# Altium PCB LazeMWC 0_2.PcbDoc
Units mm, origin at the board's own origin, x right, y up, seen from the top; angles counter-clockwise.
Board outline 32 x 22 mm, 2 copper layers (Top Layer, Bottom Layer); 26 components, 31 nets, 102 pads, 20 vias.
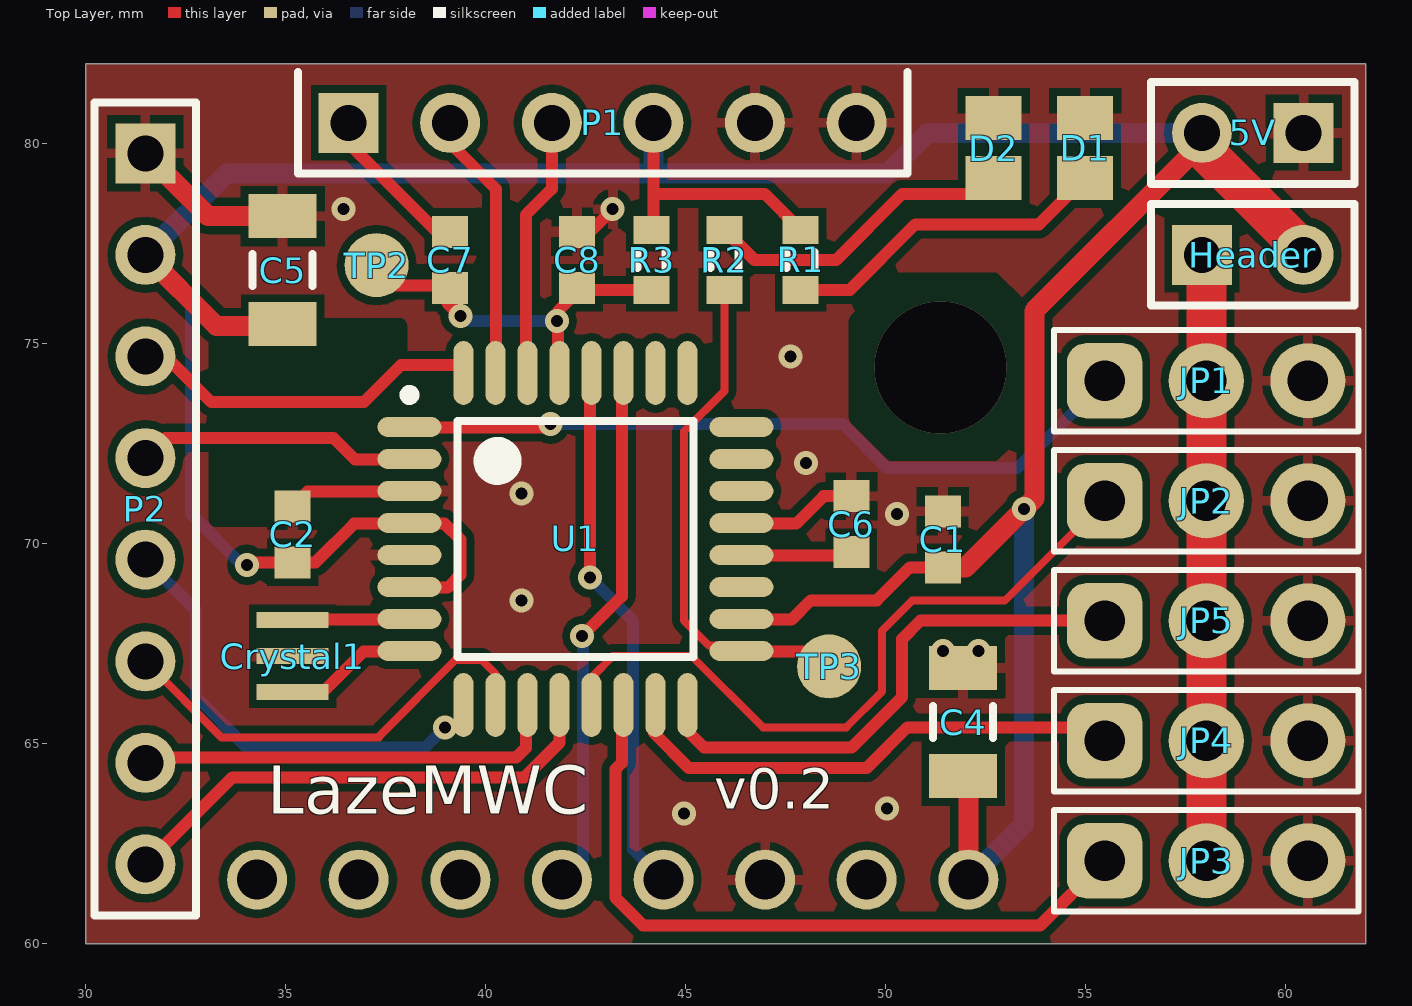
[diagram p0: Top Layer view]
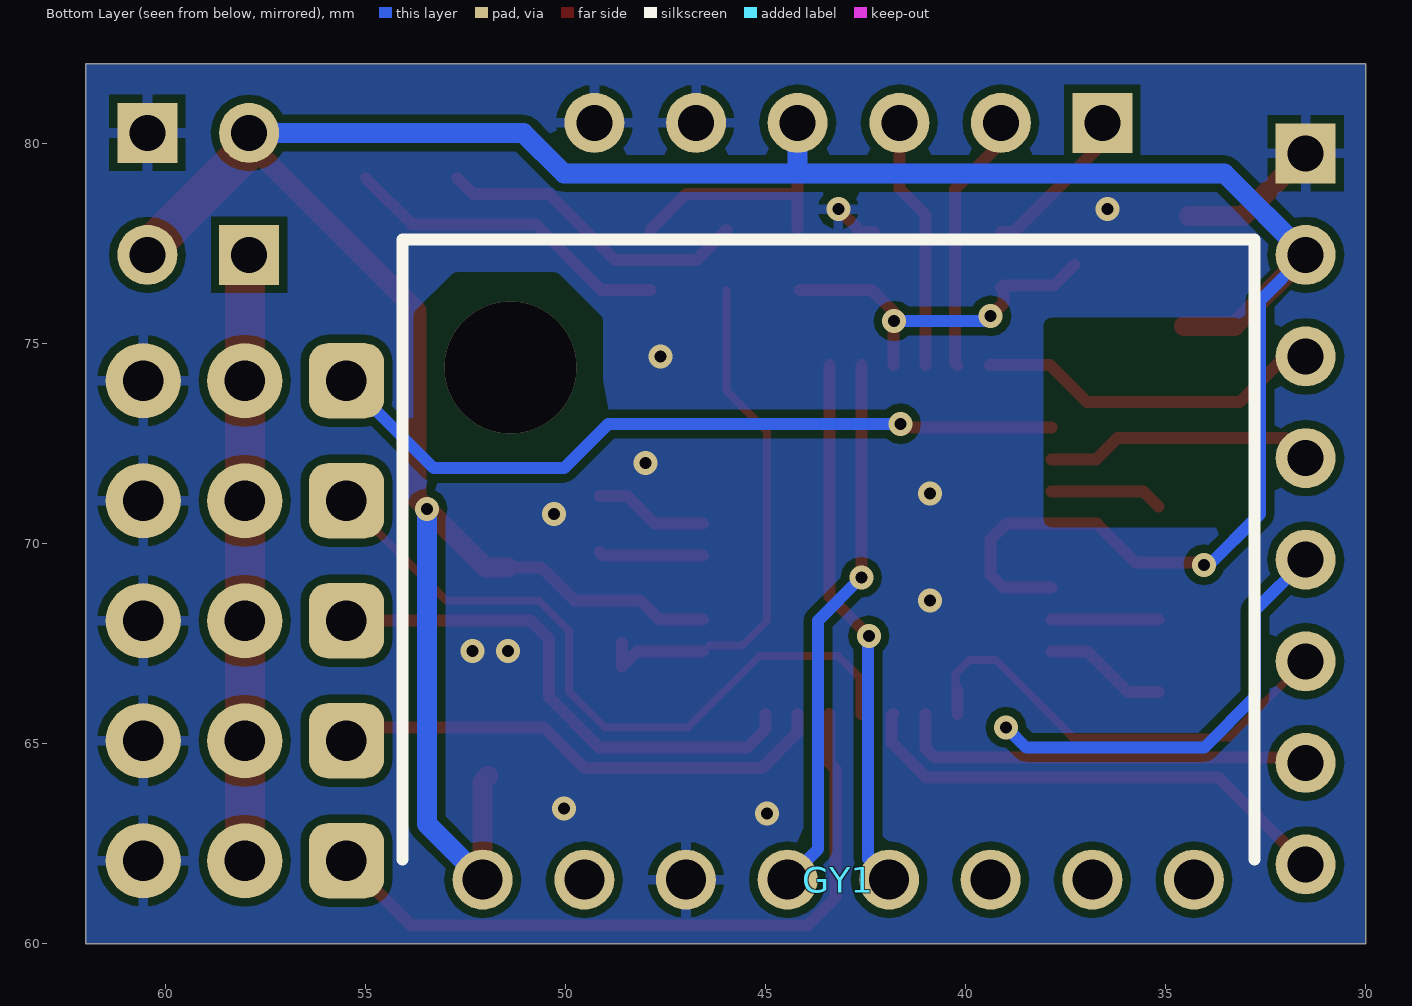
[diagram p1: Bottom Layer view, seen from below]

## Layer stack, top to bottom
Top Layer: signal copper 0.0356
Dielectric: dielectric 0.32, FR-4, Dk 4.8
Bottom Layer: signal copper 0.0356

## Board outline
30,60 30,82 62,82 62,60

## Design rules (kind name [scope] priority, off if disabled: settings)
Clearance [All] p1: gap=0.2
HoleSize [All] p1: absolutevalues=TRUE maxlimit=4 minlimit=0.3 maxpercent=80.000 minpercent=20.000
HoleToHoleClearance [All] p1: gap=0.2 allowstackedmicrovias=TRUE
MinimumSolderMaskSliver [All] p1: minsoldermaskwidth=0
PolygonConnect [All] p1: connectstyle=Relief reliefconductorwidth=0.254 reliefentries=4 polygonreliefangle="90 Angle"
RoomDefinition LazeMWC [InComponentClass('LazeMWC')] p1: confinementstyle=ConfineOut formatcopy=TRUE lockcomponents=FALSE outline 57.023,10.541 192.913,10.541 192.913,35.052 57.023,35.052
RoutingVias [All] p1: holewidth=0.3 width=0.6 viastyle="Through Hole" minholewidth=0.3 minwidth=0.6 maxholewidth=4 maxwidth=4
SilkToSilkClearance [All] p1: silktosilkclearance=0.2
SilkscreenOverComponentPads [All] p1: minsilkscreentomaskgap=0
SolderMaskExpansion [All] p1: expansion=0.102
Width [All] p1: maxlimit=3 minlimit=0.2 preferedwidth=0.3
23 further rules are at their usual default settings.

## Components (designator, comment, footprint, x,y, rotation, side; value= is the part's Value field where it differs from the comment)
5V "Header 2" HDR1X2 60.452,80.264 r180 top
C1 "104" CAPC1608L 51.435,70.104 r270 top
C2 "104" CAPC1608L 35.179,70.231 r270 top
C4 "20uF" CAPC3216L 51.943,65.532 r270 top
C5 "20uF" CAPC3216L 34.925,76.835 r270 top
C6 "104" CAPC1608L 49.149,70.485 r90 top
C7 "104" CAPC1608L 39.116,77.089 r90 top
C8 "RST" CAPC1608L 42.291,77.089 r270 top
Crystal1 "16MHz" Crystal3Foot 35.179,67.183 r180 top
D1 "Pwr" CAPC2012L 54.991,79.883 r90 top
D2 "LED" CAPC2012L 52.705,79.883 r90 top
GY1 "GY-87" GY-87 52.07,61.595 r90 bottom locked
Header "Header 2" HDR1X2 57.912,77.216 r0 top
JP1 "Servo out 1" JP 58,74 r0 top
JP2 "Servo out 1" JP 58,71 r0 top
JP3 "Servo out 1" JP 58,62 r0 top
JP4 "Servo out 1" JP 58,65 r0 top
JP5 "Servo out 1" JP 58,68 r0 top
P1 "FTDI" HDR1X6 36.576,80.518 r0 top locked
P2 "PWM IN" HDR1X8 31.496,79.756 r270 top
R1 "1k" RESC1608L 47.879,77.089 r90 top
R2 "1k" RESC1608L 45.974,77.089 r270 top
R3 "10k" RESC1608L 44.154,77.089 r90 top
TP2 "Test Pad" "Test Pad"#1 37.211,76.835 r90 top
TP3 "Test Pad" "Test Pad"#2 48.768,66.929 r90 top
U1 "ATMEGA8_TQFP32" atmega328fix 42.249,70.114 r0 top locked

## Footprints (in the part's own frame and the unit in brackets; to place one, negate y for a bottom-side part, rotate by r counter-clockwise, add the part's x,y. Pads: shape width x height; smd on the part's side, far side on the other; paste and mask are expansions set on the pad)
atmega328fix [mm] "QFP, 32-Leads, Body 9.0x9.0mm (max), Pitch 0.80mm, IPC Medium Density"
  oval 1.6x0.5 smd: 1(-4.15,2.8) 2(-4.15,2) 3(-4.15,1.2) 4(-4.15,0.4) 5(-4.15,-0.4) 6(-4.15,-1.2) 7(-4.15,-2) 8(-4.15,-2.8) 17(4.15,-2.8) 18(4.15,-2) 19(4.15,-1.2) 20(4.15,-0.4) 21(4.15,0.4) 22(4.15,1.2) 23(4.15,2) 24(4.15,2.8)
  oval 0.5x1.6 smd: 9(-2.8,-4.15) 10(-2,-4.15) 11(-1.2,-4.15) 12(-0.4,-4.15) 13(0.4,-4.15) 14(1.2,-4.15) 15(2,-4.15) 16(2.8,-4.15) 25(2.8,4.15) 26(2,4.15) 27(1.2,4.15) 28(0.4,4.15) 29(-0.4,4.15) 30(-1.2,4.15) 31(-2,4.15) 32(-2.8,4.15)
  silkscreen extent -4.27,-2.95 2.95,3.72, body extent -3.5,-3.5 3.5,3.5, height 2
CAPC1608L [mm] "Chip Capacitor, Body 1.6x0.8mm, IPC High Density"
  rect 0.8x0.9 smd: 1(-0.7,0) 2(0.7,0)
  body extent -0.87,-0.48 0.87,0.48, height 1.3
CAPC2012L [mm] "Chip Capacitor, Body 2.0x1.3mm, IPC High Density"
  rect 1.1x1.4 smd: 1(-0.75,0) 2(0.75,0)
  body extent -1.1,-0.72 1.1,0.72, height 1.4
CAPC3216L [mm] "Chip Capacitor, Body 3.2x1.6mm, IPC High Density"
  rect 1.1x1.7 smd: 1(-1.35,0) 2(1.35,0)
  silkscreen extent -0.4,-0.75 0.4,0.75, body extent -1.7,-0.9 1.7,0.9, height 1.3
Crystal3Foot [mm]
  rect 1.8x0.4 smd: 1(0,0.9) 2(0,0) 3(0,-0.9)
GY-87 [mm]
  round 1.5 hole 1: 1(0,0) 2(0,-2.54) 3(0,-5.08) 4(0,-7.62) 5(0,-10.16) 6(0,-12.7) 7(0,-15.24) 8(0,-17.78)
  Top Layer pour cut-out: 14.097,1.524 14.986,0.635 14.986,-1.778 13.97,-2.794 11.557,-2.794 10.668,-1.905 10.668,0.635 11.557,1.524
  Bottom Layer pour cut-out: 11.557,1.524 14.097,1.524 14.986,0.635 14.986,-1.778 13.97,-2.794 11.557,-2.794 10.668,-1.905 10.668,0.635
  silkscreen extent 0.5,-19.3 16,2
HDR1X2 [mm] "Connector; Header; 2 Position"
  rect 1.5x1.5 hole 0.9: 1(0,0)
  round 1.5 hole 0.9: 2(2.54,0)
  silkscreen extent -1.27,-1.27 3.81,1.27
HDR1X6 [mm] "Connector; Header; 6 Position"
  rect 1.5x1.5 hole 0.9: 1(0,0)
  round 1.5 hole 0.9: 2(2.54,0) 3(5.08,0) 4(7.62,0) 5(10.16,0) 6(12.7,0)
  silkscreen extent -1.27,-1.27 13.97,1.27
HDR1X8 [mm] "Connector; Header; 8 Position"
  rect 1.5x1.5 hole 0.9: 1(0,0)
  round 1.5 hole 0.9: 2(2.54,0) 3(5.08,0) 4(7.62,0) 5(10.16,0) 6(12.7,0) 7(15.24,0) 8(17.78,0)
  silkscreen extent -1.27,-1.27 19.05,1.27
JP [mil]
  rrect50% 74x74 hole 40: 1(-99.27,2.73)
  round 74 hole 40: 2(0.73,2.73) 3(100.73,2.73)
  silkscreen extent -149,-47 151,53, body extent -147,-45 149,50, height 394
RESC1608L [mm] "Chip Resistor, Body 1.6x0.8mm, IPC High Density"
  rect 0.7x0.9 smd: 1(-0.75,0) 2(0.75,0)
  silkscreen extent -0.2,-0.35 0.2,0.35, body extent -0.85,-0.48 0.85,0.48, height 0.9
"Test Pad"#1 [mm]
  round 1.6 smd: 1(0.127,-0.067)
"Test Pad"#2 [mm]
  round 1.6 smd: 1(0,0.18)

## Part data
5V Header: "Header, 2-Pin"
C1 C2 C4 C5 C6 C7 C8: library part "Cap Semi", "Capacitor (Semiconductor SIM Model)"
Crystal1: library part Crystal3Foot
D1 D2: library part LED2, "Typical RED, GREEN, YELLOW, AMBER GaAs LED"
JP1 JP2 JP3 JP4 JP5: library part "Hdr 3 Pin 0.1", "Header, 3-Pin, 0.1\""
P1: library part "Header 6", "Header, 6-Pin"
P2: library part "Header 8", "Header, 8-Pin"
R1 R2 R3: library part Res3, "Resistor"
U1: "Atmel Microcontroller - Library created by carel..  <www.mpfreezone.com>"

## Via types
v1: diameter 0.6, hole 0.3, Top Layer to Bottom Layer, tented both sides, 19 vias
v2: diameter 3.3, hole 3.3, Top Layer to Bottom Layer, 1 vias

## Nets (pads, with @x,y where several pads share a name; then routed paths per layer and width w, separated by ;. In a path a pad name is that pad's centre, name@x,y a point inside that pad or via, vN(x,y) a via of type N, cw(c..) or ccw(c..) an arc to the next point about the centre after c; other vN are vias at no path point)
A0: U1.23
A1: U1.24
A2: U1.25
A3: U1.26
A4: GY1.5 U1.27 | length 13.5
  Top Layer w0.3: v1(42.418,67.691) 43.406,68.679 U1.27@43.406,74.458
  Bottom Layer w0.3: GY1.5 42.433,62.118 42.433,67.676 v1(42.418,67.691)
A5: GY1.4 U1.28 | length 13.6
  Top Layer w0.3: v1(42.606,69.154) U1.28@42.606,74.458
  Bottom Layer w0.3: v1(42.606,69.154) 43.688,68.072 43.688,62.357 GY1.4
D2: P2.3 U1.32 | length 8.8
  Top Layer w0.3: P2.3 32.004,74.676 33.147,73.533 36.957,73.533 37.882,74.458 U1.32@39.406,74.458
D3: JP1.1 U1.1 | length 19
  Top Layer w0.3: U1.1@37.846,72.898 41.529,72.898 v1(41.624,72.993)
  Bottom Layer w0.3: v1(41.624,72.993) 48.927,72.993 50.038,71.882 53.291,71.882 JP1.1
D4: P2.4 U1.2 | length 6.8
  Top Layer w0.3: P2.4 32.004,72.644 36.195,72.644 36.741,72.098 U1.2@37.846,72.098
D5: P2.5 U1.9 | length 10.9
  Bottom Layer w0.3: P2.5 32.766,68.326 32.766,66.167 34.036,64.897 38.481,64.897 v1(38.989,65.405)
D6: P2.6 U1.10 | length 11.9
  Top Layer w0.2: P2.6 33.402,65.15 37.337,65.15 37.337,65.179 39.243,67.085 39.907,67.085 40.249,66.743 U1.10
  Top Layer w0.3: U1.10@40.206,65.738 U1.10@40.206,66.347
D7: P2.7 U1.11 | length 10.5
  Top Layer w0.3: P2.7 31.63,64.65 40.767,64.65 41.006,64.889 U1.11@41.006,65.738
D8: P2.8 U1.12 | length 12.3
  Top Layer w0.3: P2.8 33.67,64.15 40.974,64.15 41.848,65.024 41.848,65.696 U1.12@41.806,65.738
D9: JP2.1 U1.13 | length 18.5
  Top Layer w0.2: U1.13 42.649,66.652 43.18,67.183 45.158,67.183 46.936,65.405 49.021,65.405 49.911,66.295 49.911,67.818 50.662,68.569 52.979,68.569 JP2.1
  Top Layer w0.3: U1.13@42.606,65.738 U1.13@42.606,66.482
D10: JP3.1 U1.14 | length 17.8
  Top Layer w0.3: U1.14@43.406,65.738 43.406,64.516 43.249,64.359 43.249,61.145 43.942,60.452 53.861,60.452 JP3.1
D11: JP4.1 U1.15 | length 12.7
  Top Layer w0.3: U1.15@44.206,65.738 44.206,65.268 45.085,64.389 49.53,64.389 50.546,65.405 55.143,65.405 JP4.1
D12: JP5.1 U1.16 | length 13.2
  Top Layer w0.3: U1.16@45.006,65.738 45.006,65.357 45.466,64.897 49.149,64.897 50.411,66.159 50.411,67.611 50.87,68.069 JP5.1
D13: R2.2 TP3.1 U1.17 | length 13.2
  Top Layer w0.2: R2.2 45.974,73.816 44.958,72.8 44.958,68.072 45.582,67.448 U1.17@46.416,67.448
  Top Layer w0.3: U1.17@46.566,67.298 48.219,67.298 TP3.1 TP3.1@48.588,67.511
DTR: C7.2 P1.1 | length 3.8
  Top Layer w0.3: P1.1@36.322,80.264 38.797,77.789 C7.2
GND: 5V.1 C1.1 C2.1 C4.1 C5.1 C6.2 C8.1 Crystal1.2 D1.2 D2.2 GY1.3 JP1.3 JP2.3 JP3.3 JP4.3 JP5.3 P1.5 P1.6 P2.1 U1.3 U1.5 U1.21 | length 10.4
  Top Layer w0.3: C2.1 35.546,71.298 U1.3@37.846,71.298 ; C8.1 42.61,77.789 v1(43.18,78.359) ; U1.21@46.566,70.498 47.765,70.498 48.452,71.185 C6.2
  Top Layer w0.5: P2.1 33.067,78.185 C5.1@34.417,78.185
  other v1: 44.958,63.246 50.038,63.373 51.435,67.31 52.324,67.31 40.894,68.58 50.292,70.739 40.894,71.247 48.006,72.009 47.625,74.676 36.449,78.359
GY_3V3: GY1.2
INPUT: Header.1 JP1.2 JP2.2 JP3.2 JP4.2 JP5.2 | length 14.9
  Top Layer w1: Header.1@57.994,77 58.019,76.975 JP1.2 JP3.2
NetC6_1: C6.1 U1.20 | length 2.6
  Top Layer w0.3: U1.20@46.566,69.698 49.062,69.698 C6.1
NetCrystal1_1: Crystal1.1 U1.8 | length 3.1
  Top Layer w0.3: Crystal1.1 35.93,66.283 36.945,67.298 U1.8@37.846,67.298
NetCrystal1_3: Crystal1.3 U1.7 | length 2.7
  Top Layer w0.3: Crystal1.3@35.179,68.098 U1.7@37.846,68.098
NetD1_1: D1.1 R1.1 | length 8.3
  Top Layer w0.3: R1.1 49.106,76.339 50.745,77.978 53.836,77.978 D1.1
NetD2_1: D2.1 R2.1 | length 7.9
  Top Layer w0.3: R2.1 46.724,77.089 48.768,77.089 50.419,78.74 52.312,78.74 D2.1
RST: C7.1 C8.2 R3.1 TP2.1 U1.29 | length 8.9
  Top Layer w0.3: TP2.1 37.786,76.454 C7.1@39.051,76.454 ; C7.1 C7.1@39.051,76.454 ; v1(39.37,75.692) 39.051,76.011 C7.1@39.051,76.454 ; U1.29@41.806,74.458 v1@41.806,75.565 ; v1@41.806,75.804 42.341,76.339 R3.1
  Bottom Layer w0.3: v1@39.497,75.565 v1(41.783,75.565)
RX: P1.3 U1.30 | length 6.3
  Top Layer w0.3: U1.30@41.006,74.458 41.006,78.217 41.656,78.867 P1.3
TX: P1.2 U1.31 | length 6.6
  Top Layer w0.3: P1.2 39.116,80.01 40.259,78.867 40.259,74.511 U1.31@40.206,74.458
VCC: 5V.2 C1.2 C2.2 C4.2 C5.2 GY1.1 Header.2 P1.4 P2.2 R1.2 R3.2 U1.4 U1.6 U1.18 | length 92.4
  Top Layer w0.3: v1(34.036,69.469) 34.098,69.531 C2.2 35.749,69.531 36.716,70.498 38.976,70.498 39.37,70.104 39.37,69.215 39.053,68.898 U1.6@37.846,68.898 ; R3.2@44.196,77.881 44.196,78.74 ; P1.4 44.196,78.74 ; U1.18@46.566,68.098 47.651,68.098 48.133,68.58 49.784,68.58 50.608,69.404 C1.2 ; R1.2 46.978,78.74 44.196,78.74
  Top Layer w0.5: P2.2 33.274,75.438 C5.2@34.544,75.438 ; C1.2 52.005,69.404 v1(53.467,70.866) 53.721,71.12 53.721,75.819 5V.2@57.848,79.947 ; C4.2 52.07,64.055 GY1.1
  Top Layer w1: 5V.2@57.848,79.947 60.534,77.261 Header.2@60.534,77
  Bottom Layer w0.3: P2.2 32.639,76.073 32.639,70.739 v1@33.972,69.406
  Bottom Layer w0.5: P2.2 33.528,79.248 44.196,79.248 ; P1.4 44.196,79.248 ; GY1.1 53.467,62.992 v1(53.467,70.866) ; 5V.2@57.994,80 57.73,80.264 51.054,80.264 50.038,79.248 44.196,79.248
pads on no net: GY1.6 GY1.7 GY1.8 U1.19 U1.22
copper on no net:
  other v2: 51.37,74.395

## Polygon pours and split planes (outlines as drawn)
GND on Top Layer "Top Layer" (solid, pour order 1000): 30,60 30,82 62,82 62,60
GND on Bottom Layer "Top Layer-No Net" (solid, pour order 1001): 30,60 30,82 62,82 62,60

## Other copper
Top Layer:
  pour cut-out: 33.274,75.438 37.846,75.438 37.846,70.739 37.719,70.612 33.274,70.612
Bottom Layer:
  pour cut-out: 33.274,75.438 37.846,75.438 37.846,70.612 33.274,70.612

## Silkscreen, mask and mechanical layers (free items; w line width, h text height)
Top Overlay:
  text "v0.2" at 45.72,63.373 h1
  text "LazeMWC" at 34.544,63.246 h1.2
Mechanical 1:
  the board outline again, w0.3